# Altium PCB PCB1.PcbDoc
Units mil, origin at the board's own origin, x right, y up, seen from the top; angles counter-clockwise.
Board outline 2625 x 1355 mil, 2 copper layers (Top Layer, Bottom Layer); 7 components, 6 nets, 16 pads, 0 vias.
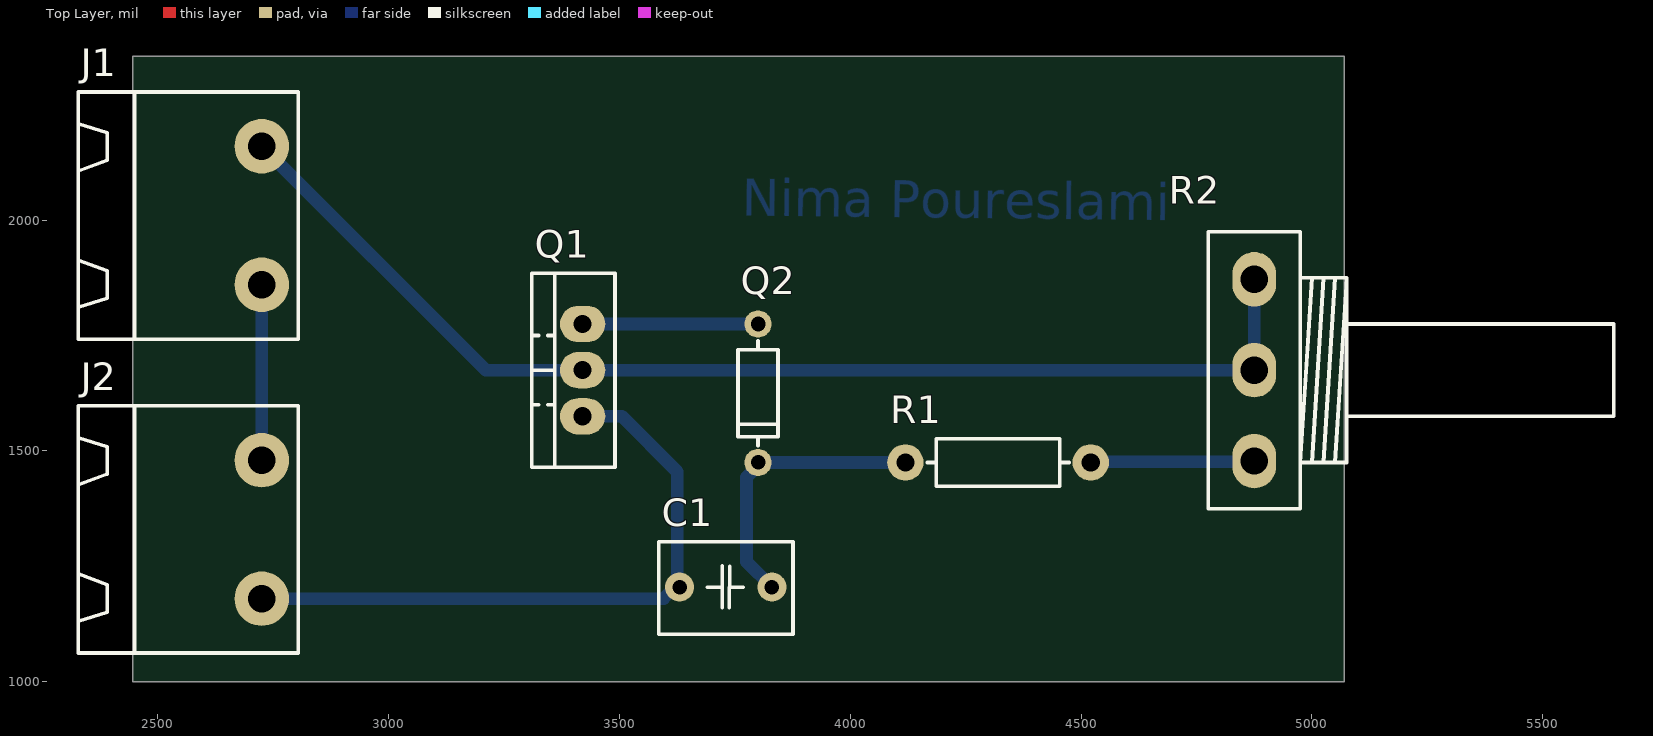
[diagram p0: Top Layer view]
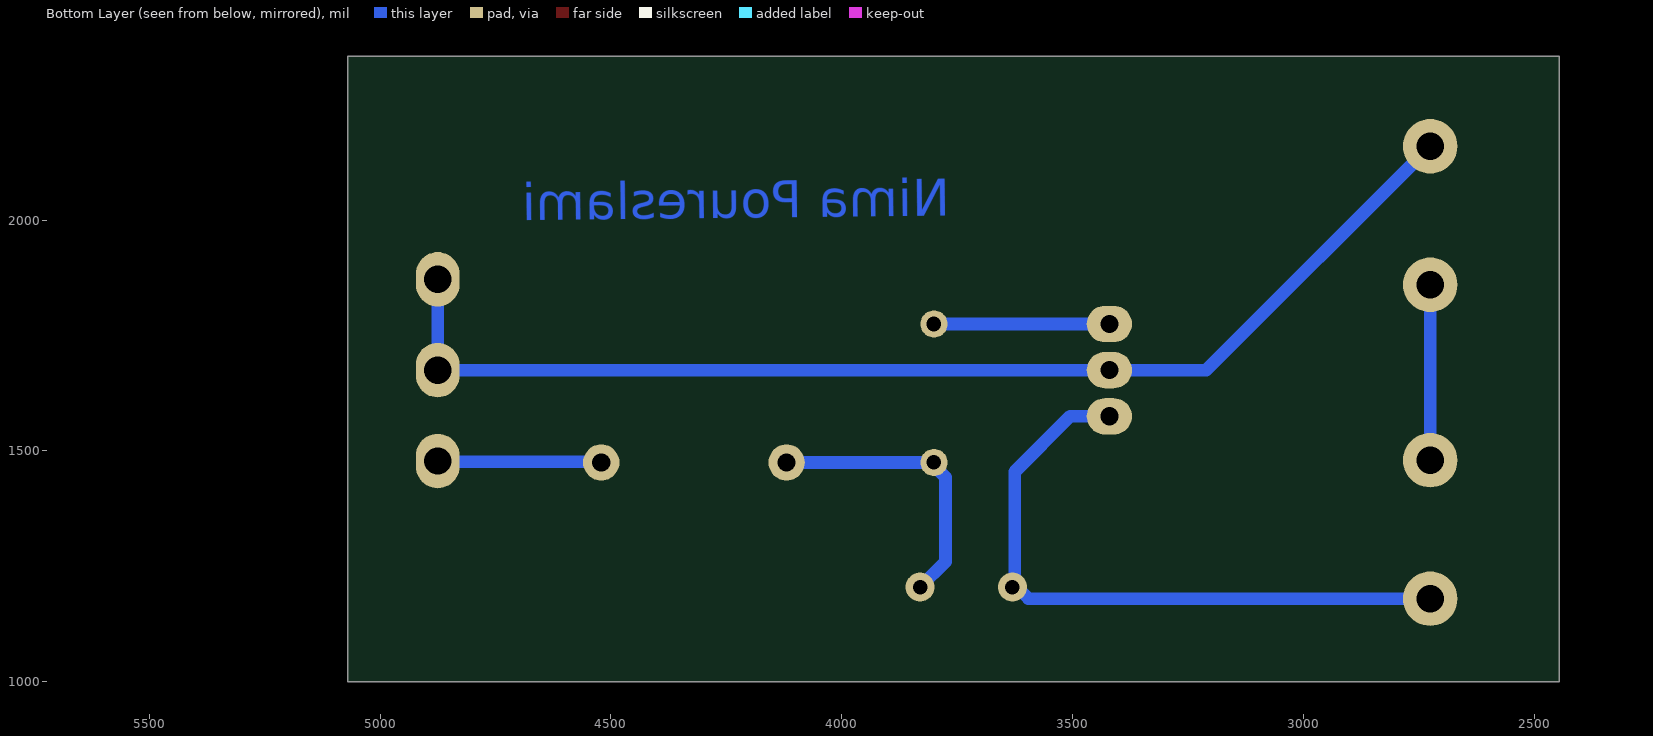
[diagram p1: Bottom Layer view, seen from below]
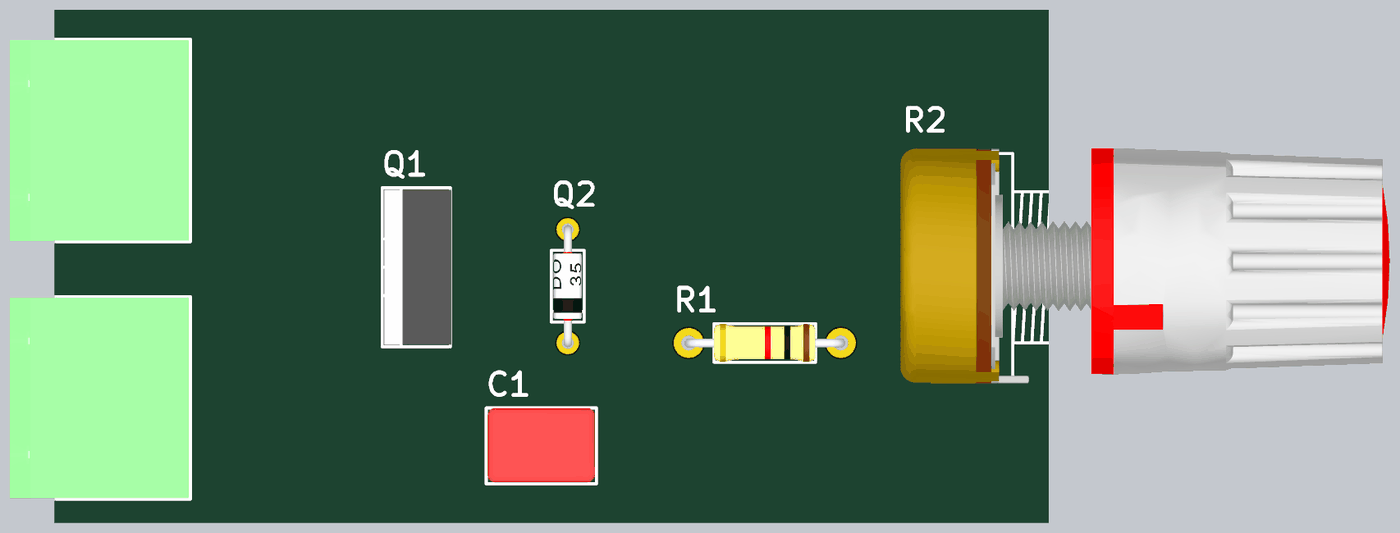
[diagram p2: 3D render of the assembled board from above, using the file's embedded part models]

## Layer stack, top to bottom
Top Solder: solder mask 0.4, Solder Resist, Dk 3.5
Top Layer: signal copper 1.4
Dielectric 1: dielectric 12.6, FR-4, Dk 4.8
Bottom Layer: signal copper 1.4
Bottom Solder: solder mask 0.4, Solder Resist, Dk 3.5

## Board outline
2445,1000 5070,1000 5070,2355 2445,2355

## Design rules (kind name [scope] priority, off if disabled: settings)
Clearance [All] p1: gap=10 ignorepadtopadclearanceinfootprint=FALSE
PolygonConnect [All] p1: connectstyle=Relief reliefconductorwidth=10 reliefentries=4 polygonreliefangle="90 Angle" airgapwidth=10
RoutingVias [All] p1: holewidth=28 width=50 viastyle="Through Hole" minholewidth=28 minwidth=50 maxholewidth=28 maxwidth=50
SolderMaskExpansion [All] p1: expansion=4 istentingtop=FALSE
Width [All] p1: maxlimit=39.37 minlimit=10 preferedwidth=27.56
30 further rules are at their usual default settings.

## Components (designator, comment, footprint, x,y, rotation, side; value= is the part's Value field where it differs from the comment)
C1 "68nF" C_FLM_7X5H10 3730,1205 r0 top
J1 "CONN_GMSTB2" GMSTB762_2 2725,2010 r90 top
J2 "CONN_GMSTB2" GMSTB762_2 2725,1330 r90 top
Q1 "BTA12" TO220_3 3420,1675 r90 top
Q2 "DB3" D_AX03_DO35 3800,1625 r270 top
R1 "3.3K" R025W_AX04 4320,1475 r180 top
R2 "POT10K" VOL_R 4875,1675 r270 top

## Footprints (in the part's own frame and the unit in brackets; to place one, negate y for a bottom-side part, rotate by r counter-clockwise, add the part's x,y. Pads: shape width x height; smd on the part's side, far side on the other; paste and mask are expansions set on the pad)
C_FLM_7X5H10 [mm] "Capacitor, THT, Metallized Polyester Film with 7.2x5.0x10mm LxTxH"
  round 1.6 hole 0.8: 1(-2.54,0) 2(2.54,0)
  silkscreen extent -3.69,-2.59 3.7,2.5, body extent -3.6,-2.5 3.6,2.5, height 10
D_AX03_DO35 [mm] "DIODE 0.3 INCH SPACING DO35"
  round 1.5 hole 0.8: 1(-3.81,0) 2(3.81,0)
  silkscreen extent -2.89,-1.1 2.89,1.1, body extent -4.09,-0.96 4.09,0.96, height 1.96
GMSTB762_2 [mm] "PHOENIX, GMSTB 2,5/2-G-7,62, 7.62mm pitch, 2pin"
  round 3 hole 1.5: 1(-3.81,0) 2(3.81,0)
  silkscreen extent -6.8,-2 6.8,10.1, body extent -6.72,-1.9 6.72,10.1, height 9.1
R025W_AX04 [mm] "RESISTOR 1/4 WATT, AXIAL0.4"
  round 2 hole 1: 1(-5.1,0) 2(5.1,0)
  silkscreen extent -3.9,-1.3 3.9,1.3, body extent -5.38,-1.28 5.38,1.28, height 2.6
TO220_3 [mm] "TO-220 3 LEAD, TO-262, pitch: 2.54mm  10x4.5mm"
  oval 2x2.5 hole 1: 1(-2.54,0) 2(0,0) 3(2.54,0)
  silkscreen extent -5.33,-1.78 5.33,2.79, body extent -5.2,-1.85 5.2,2.65, height 19
VOL_R [mm] "VOULME RIGHT ANGLE"
  oval 3x2.4 hole 1.5: 1(-5,0) 2(0,0) 3(5,0)
  silkscreen extent -7.62,-2.54 7.62,19.78, body extent -10.76,-5 10.93,27.8, height 24.54

## Part data
C1: library part CAP_THD_FLM_1uF_63v, "CAP, FILM", ASSEMBLY=ASSEMBLY, DESC="CAP, FILM,", MANF=WIMA, MANF_P#=MKS2C041001F00JA00, PARAM="PET, 5%, AEC-Q200, -55~125oC", PARAM2=63VDC/40VAC, PRICE=0.37$
J1 J2: library part CONN_GMSTB762_2, "CONN, PHOENIX GMSTB, 7.62mm pitch", MANF_P#="GMSTB 2,5/2-G-7,62", PARAM=12A, PARAM2=630V
Q1: library part TRIAC_BTA12-600_TO220, "Triac, 600V, 12A, TO-220", MANF=ST, MANF_P#="BTA12-600BW, BTA12-600CW, BTA12-600TW", PRICE=1200toman@PAYA
Q2: library part DIAC_DB3_DO35, "Diac, 32VBO, DO-35", MANF=ST, MANF_P#=DB3, PARAM="2A, -40~125oC", PARAM2=32VBO, PRICE=toman@PAYA
R1: library part RES_THD, "RESISTOR, THD", ASSEMBLY=ASSEMBLY, DESC=DESCRIPTION, DIST#=MOUSER, MANF="KOA SPEER", MANF_P#=RK73H1ETTP4701F, PARAM=0.063W, PARAM2=1%, PRICE="100= 0.5$"
R2: library part RES_THD_POT_VOL, "RESISTOR, THD, Potentiometer Volume"

## Nets (pads, with @x,y where several pads share a name; then routed paths per layer and width w, separated by ;. In a path a pad name is that pad's centre, name@x,y a point inside that pad or via, vN(x,y) a via of type N, cw(c..) or ccw(c..) an arc to the next point about the centre after c; other vN are vias at no path point)
L: C1.1 J2.1 Q1.1 | length 1431.3
  Bottom Layer w27.56: J2.1@2730,1175 J2.1 2727.5,1177.5 2730,1180 3595.41,1180 3620.41,1205 C1.1 3625,1210 3625,1455 3505,1575 Q1.1
N: J1.1 J2.2 | length 380
  Bottom Layer w27.56: J2.2 J1.1
NetC1_2: C1.2 Q2.2 R1.2 | length 622.3
  Bottom Layer w27.56: C1.2 3775,1260 3775,1443.11 3800,1468.11 Q2.2 R1.2
NetJ1_2: J1.2 Q1.2 R2.1 R2.2 | length 2556.9
  Bottom Layer w27.56: J1.2@2725,2165 J1.2 3210,1675 Q1.2 R2.2 4875,1860 4870,1865 4875,1870 R2.1
NetQ1_3: Q1.3 Q2.1 | length 394
  Bottom Layer w27.56: Q1.3@3433.98,1775 Q1.3 Q2.1
NetR1_1: R1.1 R2.3 | length 358.1
  Bottom Layer w27.56: R1.1 4522.36,1476.57 4871.57,1476.57 4875,1480 R2.3

## Other copper
Bottom Layer:
  text "Nima Poureslami" at 3765,2010 h80 r359.38